# Altium PCB turnRacingMain.PcbDoc (part 2 of 2)
Units mil, origin at the board's own origin, x right, y up, seen from the top; angles counter-clockwise.
Board outline 9596.84 x 4626.79 mil, 2 copper layers (Component Side, Bottom Layer), stack 12.8 mil thick; 110 components, 131 nets, 424 pads, 166 vias.
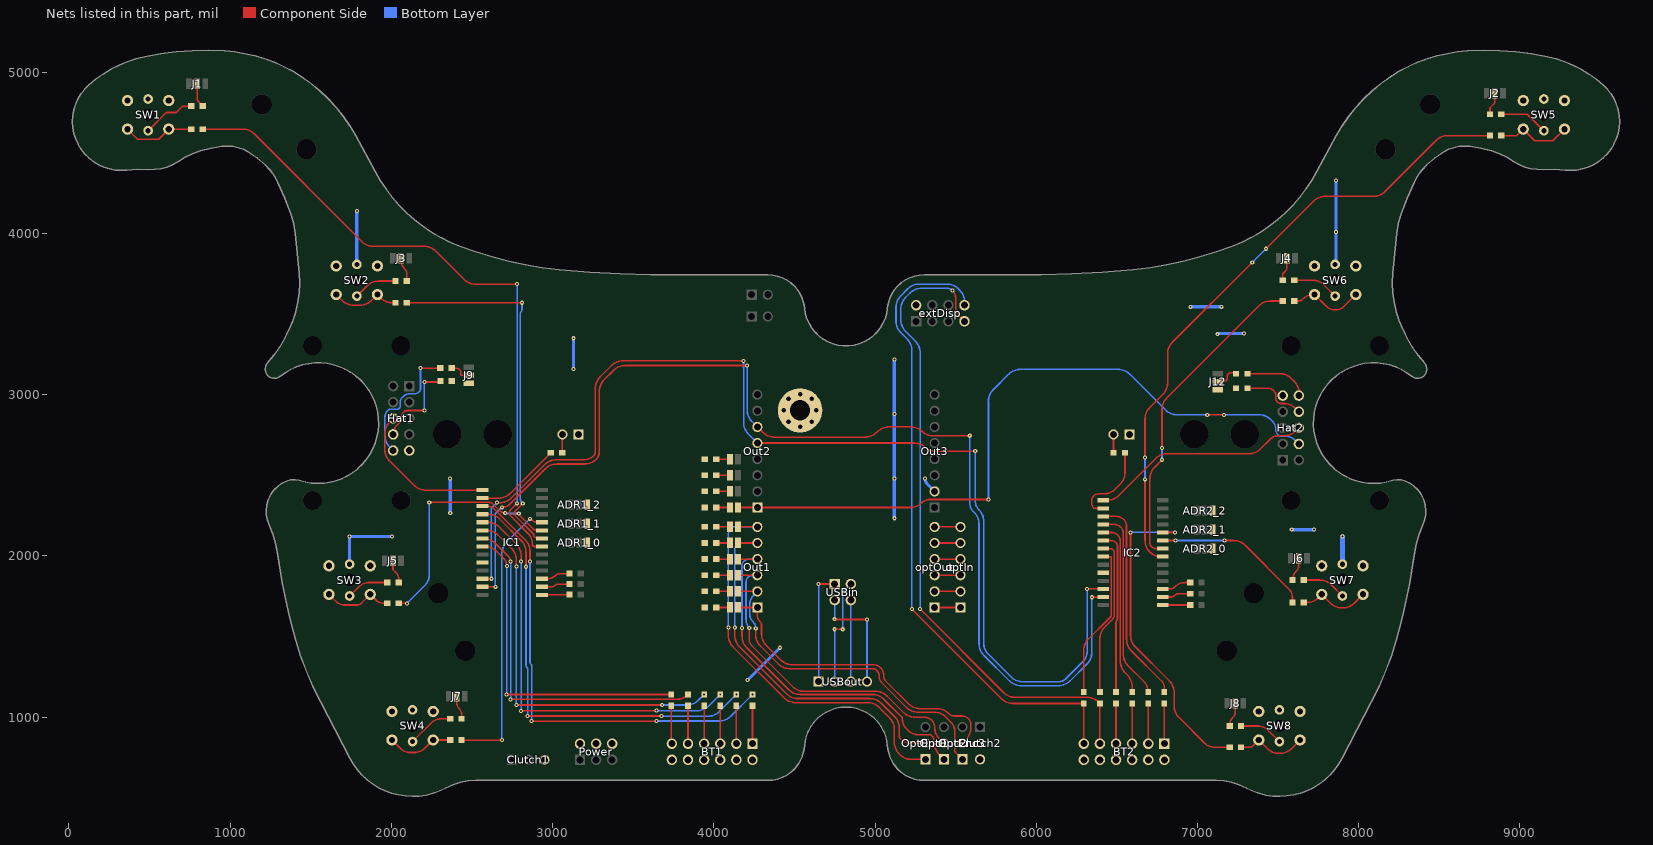
[diagram p2: the nets of this part, all layers, seen from the top]

## Via types
v1: diameter 25.2, hole 11.81, Component Side to Bottom Layer, 158 vias
v2: diameter 50, hole 28, Component Side to Bottom Layer, 8 vias

## Nets (pads, with @x,y where several pads share a name; then routed paths per layer and width w, separated by ;. In a path a pad name is that pad's centre, name@x,y a point inside that pad or via, vN(x,y) a via of type N, cw(c..) or ccw(c..) an arc to the next point about the centre after c; other vN are vias at no path point) (continued)
EncB2: Hat2.4 J14.1 Out2.1 | length 4400.7
  Component Side w10: J14.1@4150,2300 Out2.1@4270,2300 5219.37,2300 ccw(c5219.37,2400) 5290.08,2329.29 cw(c5340.08,2279.29) 5340.08,2350 v1(5703.58,2350) ; v1(7060.94,2875) 7159.05,2875 cw(c7159.05,2866.59) 7165,2872.54 v1(7165,2875)
  Bottom Layer w10: v1(5703.58,2350) 5703.58,2960.29 cw(c5803.58,2960.29) 5732.87,3031 5829.44,3127.58 cw(c5900.15,3056.87) 5900.15,3156.87 6508.56,3156.87 cw(c6508.56,3056.87) 6579.27,3127.58 6802.56,2904.29 ccw(c6873.27,2975) 6873.27,2875 v1(7060.94,2875) ; v1(7165,2875) 7383.58,2875 cw(c7383.58,2775) 7454.29,2845.71 7465.71,2834.29 cw(c7415.19,2783.77) 7486.64,2783.77 7486.64,2782.64 ccw(c7533.16,2782.64) 7500.26,2749.74 ccw(c7515.3,2764.77) 7515.3,2743.51 7538.39,2743.51 cw(c7538.39,2643.51) 7609.1,2714.22 Hat2.4@7629.12,2694.21
EncCom1: Hat1.10 R41.1 | length 805.1
  Component Side w10: v1(2181.51,3164.23) cw(c2183.38,3162.36) 2183.38,3165 R41.1@2304.13,3165
  Bottom Layer w10: Hat1.10@2010.89,2653.29 1989.29,2674.89 cw(c2060,2745.6) 1960,2745.6 1960,2856.72 cw(c2028.28,2856.72) 1980,2905 cw(c1990.97,2894.03) 1990.97,2909.54 2035.52,2909.54 ccw(c2035.52,2928.17) 2048.69,2915 ccw(c2033.46,2930.23) 2055,2930.23 2055,2954.22 cw(c2091.46,2954.22) 2065.68,2980 2076.39,2990.71 cw(c2110.89,2956.21) 2110.89,3005 2137.45,3005 ccw(c2137.45,3058.11) 2175,3020.56 ccw(c2160.59,3034.97) 2180.97,3034.97 2180.97,3164.23 v1(2181.51,3164.23)
EncCom2: Hat2.10 R43.1 | length 400.9
  Component Side w10: R43.1@7310.43,3130 7510.99,3130 cw(c7510.99,3030) 7581.7,3100.71 7599.83,3082.58 cw(c7529.12,3011.87) 7629.12,3011.87 Hat2.10@7629.12,2994.21
GND: ADR1_0.1 ADR1_1.1 ADR1_2.1 ADR2_0.1 ADR2_1.1 ADR2_2.1 BT1.2 BT1.4 BT1.6 BT1.8 BT1.10 BT1.12 BT2.2 BT2.4 BT2.6 BT2.8 BT2.10 BT2.12 Clutch1.3 Clutch2.3 extDisp.2 Hat1.9 Hat2.9 IC1.10 IC2.10 J9.1 J12.1 M1.1 Out3.2 Power.2 Power.4 Power.6 R9.2 R10.2 R11.2 R12.2 R13.2 R14.2 R15.2 R16.2 R17.2 R18.2 R42.1 R44.1 Shift1.1 Shift2.1 SW1.1 SW1.2 SW1.6 SW2.1 SW2.2 SW2.6 SW3.1 SW3.2 SW3.6 SW4.1 SW4.2 SW4.6 SW5.1 SW5.2 SW5.6 SW6.1 SW6.2 SW6.6 SW7.1 SW7.2 SW7.6 SW8.1 SW8.2 SW8.6 | length 3769.1
  Component Side w10: SW1.6@481.41,4824.23 SW1.6@491.26,4834.07 SW1.6@501.1,4824.23 ; v1(6956.42,3545) ccw(c6956.42,3550.06) v1@6960,3546.48
  Component Side w20: v1(5119.8,2480) v1@5120,2480
  Bottom Layer w10: v1(7123.13,3375) cw(c7135.2,3362.93) 7135.2,3380
  Bottom Layer w20: SW3.6@1740.89,1948.18 v1(1740.89,2120) v1(2005,2120) ; SW2.6@1785.59,3807.96 v1(1785.59,4140) ; v1(2364.42,2479.7) cw(c2363,2478.29) 2365,2478.29 v1(2365,2265) ; v1(3129.44,3160) ccw(c3128.1,3161.34) 3130,3161.34 v1(3130,3350) ; v1(4210,1230) 4210.42,1230 v1(4410.42,1430) ; v1(5119.92,3216.87) 5119.66,3216.61 v1(5119.66,2880) 5119.8,2879.86 v1(5119.8,2480) 5119.8,2233.23 v1(5120,2233.43) ; v1(5310,2480) ccw(c5358.28,2480) 5324.14,2445.86 Out3.2@5370,2400 ; v1(6956.42,3545) v1(7148.42,3545) ; 7135.2,3380 v1(7290,3380) ; v1(7585,2162.52) 7720.71,2162.52 cw(c7720.71,2159.3) 7722.99,2161.58 v1(7722.99,2162.88) ; SW6.6@7854.41,3807.96 ccw(c7840.91,3821.46) 7860,3821.46 v1(7860,4010) v1(7860,4328.88)
  Bottom Layer w30: SW7.6@7899.11,1948.18 v1(7899.11,2120)
  other v2: 4535,2801.14 4463.31,2830.84 4606.69,2830.84 4433.62,2902.52 4636.38,2902.52 4463.31,2974.2 4606.69,2974.2 4535,3003.9
NetHat1_8: Hat1.8 R42.2 | length 570.6
  Component Side w10: Hat1.8@2010.89,2753.29 cw(c2090.02,2753.29) 2034.07,2809.25 2046.97,2822.16 ccw(c2015.53,2853.6) 2060,2853.6 2060,2854.88 cw(c2111.21,2854.88) 2074.99,2891.09 2077.86,2893.96 cw(c2096.32,2875.5) 2096.32,2901.6 2204.01,2901.6 v1(2204.56,2901.05) ; v1(2205,3078.21) 2288.17,3078.21 ccw(c2288.17,3101.4) R42.2@2304.57,3085
  Bottom Layer w10: v1(2204.56,2901.05) cw(c2203.51,2900) 2205,2900 v1(2205,3078.21)
NetHat2_8: Hat2.8 R44.2 | length 396.8
  Component Side w10: R44.2@7310.43,3040 7437.56,3040 cw(c7437.56,2994.12) 7470,3026.56 7480.54,3016.02 cw(c7469.78,3005.26) 7485,3005.26 7485,2978.22 ccw(c7517.84,2978.22) 7494.62,2955 7494.71,2954.91 ccw(c7518.64,2978.85) 7518.64,2945 7536.9,2945 cw(c7536.9,2845) 7607.61,2915.71 Hat2.8@7629.12,2894.21
NetIC1_2: IC1.2 R19.1 | length 536
  Component Side w10: IC1.2@2565.94,2358.19 2666.33,2358.19 ccw(c2666.33,2458.19) 2737.04,2387.48 R19.1@2989.57,2640
NetIC1_3: IC1.3 R21.1 | length 2918.1
  Component Side w10: IC1.3@2565.94,2308.19 2601.85,2308.19 cw(c2601.85,2261.3) 2635,2294.45 2830.71,2098.74 cw(c2760,2028.03) 2860,2028.03 v1(2860,1965) ; v1(2870,975) 3643.47,975 ccw(c3643.47,977.16) v1(3645,975.63)
  Bottom Layer w10: v1(2860,1965) 2860,1346.14 cw(c2858.39,1346.14) 2859.53,1345 2859.53,1341.9 ccw(c2878.21,1341.9) 2865,1328.68 cw(c2852.93,1316.61) 2870,1316.61 v1(2870,975) ; v1(3645,975.63) 4033.78,975.63 ccw(c4033.78,1075.63) 4104.49,1004.92 v1(4240,1140.43)
NetIC1_4: IC1.4 R23.1 | length 2749
  Component Side w10: IC1.4@2565.94,2258.19 2600.39,2258.19 cw(c2600.39,2158.19) 2671.1,2228.9 2805.71,2094.29 cw(c2735,2023.58) 2835,2023.58 v1(2835,1932.52) ; v1(2845,1006.57) v1(3676.21,1006.57)
  Bottom Layer w10: v1(2835,1932.52) 2835,1320.85 ccw(c2852.07,1320.85) 2840,1308.78 cw(c2827.93,1296.71) 2845,1296.71 v1(2845,1006.57) ; v1(3676.21,1006.57) cw(c3676.21,1001.21) 3680,1005 3963.58,1005 ccw(c3963.58,1105) 4034.29,1034.29 4140,1140 v1(4140,1140.43)
NetIC1_5: IC1.5 R26.1 | length 2579.7
  Component Side w10: IC1.5@2565.94,2208.19 2599.14,2208.19 cw(c2599.14,2108.19) 2669.85,2178.9 2775.71,2073.04 cw(c2705,2002.33) 2805,2002.33 v1(2805,1965) ; v1(2805,1038.91) 3642.36,1038.91 ccw(c3642.36,1042.64) v1(3645,1040)
  Bottom Layer w10: v1@2805,1035 v1(2805,1038.91) v1(2805,1965) ; v1(3645,1040) 3898.58,1040 ccw(c3898.58,1140) 3969.29,1069.29 v1(4040,1140)
NetIC1_6: IC1.6 R29.1 | length 2387.9
  Component Side w10: IC1.6@2565.94,2158.19 2591.27,2158.19 cw(c2591.27,2058.19) 2661.98,2128.9 2745.71,2045.17 cw(c2675,1974.45) 2775,1974.45 v1(2775,1935) ; v1(2775,1075) v1(3680,1075)
  Bottom Layer w10: v1(2775,1075) v1(2775,1935) ; v1(3680,1075) 3833.58,1075 ccw(c3833.58,1175) 3904.29,1104.29 v1(3940,1140)
NetIC1_7: IC1.7 R32.1 | length 2200.9
  Component Side w10: IC1.7@2565.94,2108.19 2573,2108.19 cw(c2573,2008.19) 2643.71,2078.9 2727.55,1995.05 cw(c2697.5,1965) v1(2740,1965) ; v1(2740,1110) 3768.14,1110 ccw(c3768.14,1210) 3838.85,1139.29 R32.1@3840,1140.43
  Bottom Layer w10: v1(2740,1110) v1(2740,1965)
NetIC1_8: IC1.8 R35.1 | length 2028.6
  Component Side w10: IC1.8@2565.94,2058.19 2581.37,2058.19 cw(c2581.37,1958.19) 2652.08,2028.9 2697.66,1983.32 cw(c2652.68,1938.34) v1(2716.3,1938.34) ; v1(2715,1140) 3735.41,1140 ccw(c3735.41,1141.48) R35.1@3736.46,1140.43
  Bottom Layer w10: v1(2715,1140) ccw(c2711.87,1143.13) 2716.3,1143.13 v1(2716.3,1938.34)
NetIC1_15: IC1.15 R49.2 | length 171
  Component Side w10: IC1.15@2934.06,1758.19 3100.19,1758.19 ccw(c3100.19,1764.37) R49.2@3104.57,1760
NetIC1_16: IC1.16 R47.2 | length 175
  Component Side w10: IC1.16@2934.06,1808.19 2994.98,1808.19 ccw(c2994.98,1831.45) 3011.42,1815 cw(c3035.57,1790.86) 3035.57,1825 R47.2@3104.57,1825
NetIC1_17: IC1.17 R45.2 | length 179
  Component Side w10: IC1.17@2934.06,1858.19 2967.34,1858.19 ccw(c2967.34,1932.66) 3020,1880 cw(c3044.14,1855.86) 3044.14,1890 R45.2@3104.57,1890
NetIC1_21: IC1.21 R39.2 | length 4087.1
  Component Side w10: R39.2@830.43,4647.07 1077.92,4647.07 cw(c1077.92,4547.07) 1148.63,4617.78 1817.12,3949.29 ccw(c1887.83,4020) 1887.83,3920 2204.01,3920 cw(c2204.01,3820) 2274.72,3890.71 2451.14,3714.29 ccw(c2521.86,3785) 2521.86,3685 2777.84,3685 v1(2780,3687.16) ; v1(2780,2326.13) 2741.3,2287.43 ccw(c2764.78,2263.96) 2731.58,2263.96 ccw(c2751.32,2263.96) 2737.35,2250.01 2846.24,2141.12 cw(c2776.82,2071.69) 2875,2071.69 ccw(c2889.03,2071.69) 2879.11,2061.77 ccw(c2887.75,2070.4) 2887.75,2058.19 IC1.21@2934.06,2058.19
  Bottom Layer w10: v1(2780,2326.13) v1(2780,3687.16)
NetIC1_22: IC1.22 R36.2 | length 2297.1
  Component Side w10: R36.2@2096.32,3570 v1(2810,3570) ; v1(2814.77,2325) 2764.44,2274.67 ccw(c2775.16,2263.96) 2760,2263.96 ccw(c2774.06,2263.96) 2764.12,2254.02 2880.3,2137.84 cw(c2871.36,2128.9) 2884,2128.9 2884,2126.23 ccw(c2892.8,2126.23) 2886.58,2120 ccw(c2915.09,2148.52) 2915.09,2108.19 IC1.22@2934.06,2108.19
  Bottom Layer w10: v1(2810,3570) 2810,3527.07 cw(c2792.93,3527.07) 2805,3515 ccw(c2817.07,3502.93) 2800,3502.93 2800,2351.93 ccw(c2816.87,2351.93) 2804.94,2340 cw(c2791.9,2326.96) 2810.34,2326.96 2810.34,2325 v1(2814.77,2325)
NetIC1_23: IC1.23 R33.2 | length 1505.4
  Component Side w10: R33.2@2046.32,1706.17 2093.23,1706.17 cw(c2093.23,1702.18) v1(2096.05,1705) ; v1(2235,2331.65) 2610,2331.65 cw(c2610,2306.99) 2627.44,2324.43 2670.91,2280.95 ccw(c2709.43,2319.47) 2709.43,2265 2709.21,2265.22 v1(2706.1,2265.22) ; v1(2790,2263.13) ccw(c2805.81,2263.13) 2794.63,2251.95 2876.58,2170 ccw(c2905.09,2198.52) 2905.09,2158.19 IC1.23@2934.06,2158.19
  Bottom Layer w10: v1(2096.05,1705) 2205.71,1814.66 ccw(c2135,1885.37) 2235,1885.37 v1(2235,2331.65) ; v1(2706.1,2265.22) 2709.21,2265.22 2709.43,2265 ccw(c2713.95,2269.52) 2713.95,2263.13 v1(2790,2263.13)
NetIC1_24: IC1.24 R30.2 | length 1770.6
  Component Side w10: R30.2@2435.43,857.93 ccw(c2437.14,859.63) 2437.14,857.23 v1(2685,857.23) ; v1(2860,2230) ccw(c2912.66,2282.66) 2912.66,2208.19 IC1.24@2934.06,2208.19
  Bottom Layer w10: v1(2685,857.23) 2685,2013.58 cw(c2785,2013.58) 2714.29,2084.29 v1(2860,2230)
NetIC2_2: IC2.2 R38.1 | length 532.6
  Component Side w10: IC2.2@6415.94,2295 6357.69,2295 cw(c6388.32,2325.63) 6345,2325.63 6345,2345.86 cw(c6379.14,2345.86) 6355,2370 cw(c6391.21,2333.79) 6391.21,2385 6419.23,2385 ccw(c6419.23,2485) 6489.94,2414.29 6521.14,2445.5 ccw(c6450.43,2516.21) 6550.43,2516.21 R38.1@6550.43,2640
NetIC2_3: IC2.3 R25.1 | length 1297.7
  Component Side w10: IC2.3@6415.94,2245 6494.41,2245 cw(c6494.41,2173.45) 6545,2224.04 cw(c6508.79,2187.83) 6560,2187.83 6560,1482.73 ccw(c6660,1482.73) 6589.29,1412.02 6780,1221.31 cw(c6747.32,1188.62) 6793.54,1188.62 R25.1@6793.54,1155.43
NetIC2_4: IC2.4 R28.1 | length 1195.5
  Component Side w10: IC2.4@6415.94,2195 6482.04,2195 cw(c6482.04,2134.24) 6525,2177.2 cw(c6488.79,2140.99) 6540,2140.99 6540,1389.91 ccw(c6640,1389.91) 6569.29,1319.2 6668.09,1220.39 cw(c6603.14,1155.43) R28.1@6695,1155.43
NetIC2_5: IC2.5 R31.1 | length 1093.3
  Component Side w10: IC2.5@6415.94,2145 6468.04,2145 cw(c6468.04,2093.79) 6504.25,2130 cw(c6462.05,2087.8) 6521.73,2087.8 6521.73,1346.18 ccw(c6621.73,1346.18) 6551.02,1275.47 6565.71,1260.78 cw(c6495,1190.07) 6595,1190.07 R31.1@6595,1155.43
NetIC2_6: IC2.6 R34.1 | length 1013.8
  Component Side w10: IC2.6@6415.94,2095 6463.16,2095 cw(c6463.16,2049.97) 6495,2081.81 cw(c6473.18,2059.99) 6504.04,2059.99 6504.04,1609.75 cw(c6490.25,1609.75) 6500,1600 ccw(c6512.07,1587.93) 6495,1587.93 R34.1@6495,1155.43
NetIC2_7: IC2.7 R37.1 | length 979.9
  Component Side w10: R37.1@6395,1155.43 6395,1487.48 cw(c6495,1487.48) 6424.29,1558.19 6475.65,1609.55 ccw(c6453.07,1632.13) 6485,1632.13 6485,2020.45 ccw(c6464.42,2020.45) 6478.97,2035 6468.97,2045 IC2.7@6415.94,2045
NetIC2_8: IC2.8 R40.1 | length 971.5
  Component Side w10: R40.1@6295,1155.43 6295,1415.31 cw(c6395,1415.31) 6324.29,1486.02 ; 6311.8,1471.8 6459.96,1619.96 ccw(c6447.79,1632.13) 6465,1632.13 6465,1988.63 ccw(c6455.99,1988.63) 6462.36,1995 IC2.8@6415.94,1995
NetIC2_15: IC2.15 R50.2 | length 170.5
  Component Side w10: IC2.15@6784.06,1695 R50.2@6954.57,1695
NetIC2_16: IC2.16 R48.2 | length 175.9
  Component Side w10: IC2.16@6784.06,1745 6836.28,1745 ccw(c6836.28,1778.54) 6860,1754.82 cw(c6884.57,1730.25) 6884.57,1765 R48.2@6954.57,1765
NetIC2_17: IC2.17 R46.2 | length 181.2
  Component Side w10: IC2.17@6784.06,1795 6828.16,1795 ccw(c6828.16,1840.03) 6860,1808.19 cw(c6924.73,1743.46) 6924.73,1835 R46.2@6954.57,1835
NetIC2_21: IC2.21 R27.2 | length 3941
  Component Side w10: v1(6675,2475) 6675,2095.54 ccw(c6775,2095.54) 6704.29,2024.83 6704.83,2024.29 ccw(c6775.54,2095) 6775.54,1995 IC2.21@6784.06,1995 ; v1(6675,2610) 6675,2849.58 cw(c6775,2849.58) 6704.29,2920.29 6785.71,3001.71 ccw(c6715,3072.42) 6815,3072.42 6815,3253.58 cw(c6915,3253.58) 6844.29,3324.29 v1(7340,3820) ; v1(7425,3905) 7720.71,4200.71 cw(c7791.42,4130) 7791.42,4230 8091.98,4230 ccw(c8091.98,4330) 8162.69,4259.29 8481.18,4577.78 cw(c8551.89,4507.07) 8551.89,4607.07 R27.2@8814.57,4607.07
  Bottom Layer w10: v1(6675,2475) v1(6675,2610) ; v1(7340,3820) v1(7425,3905)
NetIC2_22: IC2.22 R24.2 | length 1997.6
  Component Side w10: v1(6780,2596.12) 6734.29,2550.41 ccw(c6805,2479.7) 6705,2479.7 6705,2080.49 ccw(c6739.14,2080.49) 6715,2056.34 ccw(c6742.39,2083.73) 6742.39,2045 IC2.22@6784.06,2045 ; v1(6780,2670) 6780,2908.79 cw(c6880,2908.79) 6809.29,2979.5 7381.46,3551.66 cw(c7452.17,3480.95) 7452.17,3580.95 R24.2@7529.57,3580.95
  Bottom Layer w10: v1(6780,2596.12) v1(6780,2670)
NetIC2_23: IC2.23 R22.2 | length 992.4
  Component Side w10: IC2.23@6784.06,2095 v1(6865,2095) ; v1(7169.03,2095) 7225.14,2095 cw(c7225.14,1995) 7295.85,2065.71 7566.56,1795 cw(c7511.02,1739.46) 7589.57,1739.46 R22.2@7589.57,1711.17
  Bottom Layer w10: v1(6865,2095) v1(7169.03,2095)
NetIC2_24: IC2.24 R20.2 | length 1997.7
  Component Side w10: v1(6585,2145.95) 6585,1506.42 ccw(c6685,1506.42) 6614.29,1435.71 6826.62,1223.38 cw(c6755.91,1152.67) 6855.91,1152.67 6855.91,1069.04 ccw(c6955.91,1069.04) 6885.2,998.33 7045,838.53 ccw(c7106.8,900.33) 7106.8,812.93 R20.2@7199.57,812.93 ; IC2.24@6784.06,2145 v1(6860,2145)
  Bottom Layer w10: v1(6585,2145.95) 6852.72,2145.95 cw(c6852.72,2142.72) 6855,2145 v1(6860,2145)
NetJ1_2: J1.2 R1.1 | length 154.7
  Component Side w10: J1.2@795,4930 795,4825.43 R1.1@830.43,4790
NetJ2_2: J2.2 R2.1 | length 142.6
  Component Side w10: R2.1@8814.57,4740 8814.57,4778.68 8845,4809.11 J2.2@8845,4870
NetJ3_2: J3.2 R3.1 | length 149.7
  Component Side w10: J3.2@2060,3845 2060,3837.48 ccw(c2147.13,3837.48) 2085.52,3775.87 cw(c2059.44,3749.8) 2096.32,3749.8 R3.1@2096.32,3705
NetJ4_2: J4.2 R4.1 | length 143.8
  Component Side w10: R4.1@7529.57,3710 7529.57,3747.3 cw(c7536.88,3747.3) 7531.71,3752.47 7545,3765.76 ccw(c7520.86,3789.91) 7555,3789.91 J4.2@7555,3845
NetJ5_2: J5.2 R5.1 | length 146.9
  Component Side w10: J5.2@2010,1970 2010,1915.94 ccw(c2011.18,1915.94) 2010.35,1915.11 2025.45,1900 cw(c1975.07,1849.62) 2046.32,1849.62 R5.1@2046.32,1835
NetJ6_2: J6.2 R6.1 | length 145.6
  Component Side w10: R6.1@7589.57,1850 cw(c7664.99,1850) 7611.66,1903.33 ccw(c7569.5,1945.48) 7629.12,1945.48 J6.2@7629.12,1985
NetJ7_2: J7.2 R7.1 | length 148.1
  Component Side w10: J7.2@2405,1130 2405,1090.82 ccw(c2455.66,1090.82) 2419.84,1055 cw(c2382.19,1017.35) 2435.43,1017.35 R7.1@2435.43,990
NetJ8_2: J8.2 R8.1 | length 149.5
  Component Side w10: R8.1@7199.57,945 cw(c7283.02,945) 7224.01,1004.01 ccw(c7197.47,1030.55) 7235,1030.55 J8.2@7235,1085
NetJ9_2: J9.2 R41.2 | length 134.9
  Component Side w10: R41.2@2375,3165 2393.44,3165 cw(c2393.44,3118.34) 2426.43,3151.33 cw(c2417.81,3142.72) 2430,3142.72 2430,3125.43 ccw(c2434.66,3125.43) 2431.37,3122.13 2432.1,3121.4 ccw(c2435.43,3124.73) 2435.43,3120.02 J9.2@2453.42,3120.02 ; J9.2@2453.44,3120 J9.2@2480,3120
NetJ10_2: J10.2 R9.1 | length 84.6
  Component Side w10: R9.1@4015.43,2600 J10.2@4100,2600
NetJ11_2: J11.2 R10.1 | length 84.6
  Component Side w10: R10.1@4015.43,2500 J11.2@4100,2500
NetJ12_2: J12.2 R43.2 | length 152.1
  Component Side w10: J12.2@7125,3080 7156.32,3080 ccw(c7156.32,3113.49) 7180,3089.81 ccw(c7167.93,3101.88) 7185,3101.88 7185,3114.1 cw(c7206,3114.1) 7191.15,3128.96 7191.33,3129.13 cw(c7210,3110.46) 7210,3136.87 7222.99,3136.87 cw(c7222.99,3113.42) R43.2@7239.57,3130
NetJ13_2: J13.2 R11.1 | length 84.6
  Component Side w10: R11.1@4015.43,2400 J13.2@4100,2400
NetJ14_2: J14.2 R12.1 | length 84.6
  Component Side w10: R12.1@4015.43,2300 J14.2@4100,2300
NetJ15_2: J15.2 R13.1 | length 84.6
  Component Side w10: R13.1@4015.43,2180 J15.2@4100,2180
NetJ16_2: J16.2 R14.1 | length 84.6
  Component Side w10: R14.1@4015.43,2080 J16.2@4100,2080
NetJ17_2: J17.2 R15.1 | length 84.6
  Component Side w10: R15.1@4015.43,1980 J17.2@4100,1980
NetJ18_2: J18.2 R16.1 | length 84.6
  Component Side w10: R16.1@4015.43,1880 J18.2@4100,1880
NetJ19_2: J19.2 R17.1 | length 84.6
  Component Side w10: R17.1@4015.43,1780 J19.2@4100,1780
NetJ20_2: J20.2 R18.1 | length 84.6
  Component Side w10: R18.1@4015.43,1680 J20.2@4100,1680
NetR1_2: R1.2 SW1.5 | length 331.6
  Component Side w10: SW1.5@491.26,4637.22 604.03,4750 665,4750 705,4790 R1.2@759.57,4790
NetR2_2: R2.2 SW5.5 | length 305.9
  Component Side w10: R2.2@8885.43,4740 9045.97,4740 SW5.5@9148.75,4637.22
NetR3_2: R3.2 SW2.5 | length 274.4
  Component Side w10: SW2.5@1785.59,3611.11 1850.19,3675.71 cw(c1920.9,3605) 1920.9,3705 R3.2@2025.45,3705
NetR4_2: R4.2 SW6.5 | length 290.6
  Component Side w10: R4.2@7600.43,3710 7714.1,3710 cw(c7714.1,3610) 7784.81,3680.71 SW6.5@7854.41,3611.11
NetR5_2: R5.2 SW3.5 | length 265.1
  Component Side w10: SW3.5@1740.89,1751.33 1795.43,1805.87 cw(c1866.14,1735.16) 1866.14,1835.16 1975.29,1835.16 R5.2@1975.45,1835
NetR6_2: R6.2 SW7.5 | length 275.2
  Component Side w10: R6.2@7660.43,1850 7759.02,1850 cw(c7759.02,1750) 7829.73,1820.71 SW7.5@7899.11,1751.33
NetR7_2: R7.2 SW4.5 | length 287.7
  Component Side w10: SW4.5@2131.36,848.09 2243.98,960.71 cw(c2314.69,890) 2314.69,990 R7.2@2364.57,990
NetR8_2: R8.2 SW8.5 | length 274.1
  Component Side w10: R8.2@7270.43,945 7370.32,945 cw(c7370.32,845) 7441.03,915.71 SW8.5@7508.65,848.09
NetUSBin_1: USBin.1 USBout.1 | length 705.4
  Component Side w10: v1(4650,1825.43) USBin.1@4749.93,1825.43
  Bottom Layer w10: USBout.1@4650,1220 v1(4650,1825.43)
NetUSBin_2: USBin.2 USBout.2 | length 676.3
  Component Side w10: v1(4749.93,1545) v1(4800,1545)
  Bottom Layer w10: v1(4749.93,1545) 4750,1545 USBout.2@4750,1220 ; v1(4800,1545) 4800,1775.5 USBin.2@4849.93,1825.43
NetUSBin_3: USBin.3 USBout.4 | length 705.5
  Component Side w10: v1(4750,1607.09) 4750,1605 v1(4950,1605)
  Bottom Layer w10: USBin.3@4749.93,1725.43 4750,1725.36 v1(4750,1607.09) ; USBout.4@4950,1220 v1(4950,1605)
NetUSBin_4: USBin.4 USBout.3 | length 505.5
  Bottom Layer w10: USBin.4@4849.93,1725.43 4850,1725.36 USBout.3@4850,1220
OptEncA1: J15.1 OptEnc1.1 Out1.6 | length 2590.4
  Component Side w10: v1(4090,1555.2) 4090,1505.94 ccw(c4190,1505.94) 4119.29,1435.23 4435.23,1119.29 ccw(c4505.94,1190) 4505.94,1090 4953.58,1090 cw(c4953.58,990) 5024.29,1060.71 5090.71,994.29 cw(c5020,923.58) 5120,923.58 5120,842.36 ccw(c5220,842.36) 5149.29,771.65 5153.44,767.5 ccw(c5224.15,838.21) 5224.15,738.21 OptEnc1.1@5312.12,738.21 ; J15.1@4150,2180 Out1.6@4270,2180
  Bottom Layer w10: v1(4090,1555.2) 4090,2126.72 cw(c4158.28,2126.72) 4110,2175 cw(c4122.07,2162.93) 4122.07,2180 Out1.6@4270,2180
OptEncA2: J17.1 OptEnc2.1 Out1.4 | length 2305.6
  Component Side w10: J17.1@4150,1980 Out1.4@4270,1980 ; v1(4175,1551.87) 4175,1501.42 ccw(c4275,1501.42) 4204.29,1430.71 4465.28,1169.72 ccw(c4535.99,1240.43) 4535.99,1140.43 4984.24,1140.43 cw(c4984.24,1040.43) 5054.96,1111.14 5162.15,1003.95 cw(c5143.2,985) 5170,985 ccw(c5248.31,985) 5192.94,929.63 5203.27,919.29 ccw(c5273.98,990) 5273.98,890 5339.52,890 cw(c5339.52,872.93) 5351.59,885 cw(c5307.16,840.57) 5370,840.57 5370,836.75 ccw(c5470,836.75) 5399.29,766.04 OptEnc2.1@5427.12,738.21
  Bottom Layer w10: v1(4175,1551.87) 4175,1940.86 cw(c4209.14,1940.86) 4185,1965 cw(c4221.21,1928.79) 4221.21,1980 Out1.4@4270,1980
OptEncA3: J19.1 OptEnc3.1 Out1.2 | length 2133
  Component Side w10: J19.1@4150,1780 Out1.2@4270,1780 ; v1(4260,1550) 4260,1511.42 ccw(c4360,1511.42) 4289.29,1440.71 4400.71,1329.29 ccw(c4471.42,1400) 4471.42,1300 4985.86,1300 cw(c4985.86,1265.86) 5010,1290 cw(c4970.13,1250.13) 5026.51,1250.13 5026.51,1247.48 ccw(c5072.37,1247.48) 5039.95,1215.05 5195.71,1059.29 ccw(c5266.42,1130) 5266.42,1030 5368.58,1030 cw(c5368.58,930) 5439.29,1000.71 5470,970 cw(c5409.64,909.64) 5495,909.64 5495,792.07 ccw(c5511.27,792.07) 5499.77,780.56 OptEnc3.1@5542.12,738.21
  Bottom Layer w10: v1(4260,1550) 4260,1551.3 ccw(c4205.27,1551.3) 4243.97,1590 cw(c4295.46,1641.49) 4222.64,1641.49 4222.64,1691.22 cw(c4322.64,1691.22) 4251.93,1761.93 Out1.2@4270,1780
OptEncB1: J16.1 OptEnc1.2 Out1.5 | length 2339.4
  Component Side w10: v1(4130.22,1555) 4130.22,1506.21 ccw(c4230.22,1506.21) 4159.51,1435.5 4450.71,1144.29 ccw(c4521.42,1215) 4521.42,1115 4967.7,1115 cw(c4967.7,1015) 5038.41,1085.71 5125,999.12 cw(c5064.64,938.76) 5150,938.76 5150,889.19 ccw(c5188.83,889.19) 5161.37,861.73 ccw(c5218.16,918.52) 5218.16,838.21 OptEnc1.2@5312.12,838.21 ; J16.1@4150,2080 Out1.5@4270,2080
  Bottom Layer w10: v1(4130.22,1555) 4130.22,2039.31 cw(c4180.69,2039.31) 4145,2075 cw(c4157.07,2062.93) 4157.07,2080 Out1.5@4270,2080
OptEncB2: J18.1 OptEnc2.2 Out1.3 | length 2079.5
  Component Side w10: J18.1@4150,1880 Out1.3@4270,1880 ; v1(4220,1551.87) 4220,1477.11 ccw(c4266.11,1477.11) 4233.5,1444.51 4488.73,1189.29 ccw(c4559.44,1260) 4559.44,1160 5003.58,1160 cw(c5003.58,1060) 5074.29,1130.71 5176.22,1028.78 ccw(c5246.93,1099.49) 5246.93,999.49 5304.54,999.49 cw(c5304.54,932.94) 5351.59,980 cw(c5307.16,935.57) 5370,935.57 ccw(c5467.15,935.57) 5398.45,866.87 OptEnc2.2@5427.12,838.21
  Bottom Layer w10: v1(4220,1551.87) 4222.06,1551.87 cw(c4275.31,1605.12) 4200,1605.12 4200,1840.32 cw(c4234.9,1840.32) 4210.22,1865 cw(c4246.44,1828.79) 4246.44,1880 Out1.3@4270,1880
OptEncB3: J20.1 OptEnc3.2 Out1.1 | length 1990.9
  Component Side w10: J20.1@4150,1680 Out1.1@4270,1680 4270,1631.21 ccw(c4321.21,1631.21) 4285,1595 cw(c4258.37,1568.37) 4296.03,1568.37 4296.03,1515.39 ccw(c4396.03,1515.39) 4325.32,1444.68 4415.71,1354.29 ccw(c4486.42,1425) 4486.42,1325 4986.81,1325 cw(c4986.81,1256.95) 5034.93,1305.07 5035,1305 cw(c4991.6,1261.6) 5052.98,1261.6 5052.98,1250.47 ccw(c5085.43,1250.47) 5062.48,1227.52 5207.85,1082.15 ccw(c5278.56,1152.86) 5278.56,1052.86 5384.72,1052.86 cw(c5384.72,952.86) 5455.43,1023.57 5458.99,1020 ccw(c5491.42,1052.42) 5491.42,1006.57 5542.12,1006.57 cw(c5542.12,955.11) 5578.5,991.5 5580,990 cw(c5543.79,953.79) 5595,953.79 5595,940.59 cw(c5475.5,940.59) 5560,856.09 OptEnc3.2@5542.12,838.21
OptSw1: BT1.1 R21.2 | length 234.6
  Component Side w10: BT1.1@4240,835 R21.2@4240,1069.57
OptSw2: BT1.3 R23.2 | length 234.6
  Component Side w10: BT1.3@4140,835 R23.2@4140,1069.57
OptSw3: BT1.5 R26.2 | length 234.6
  Component Side w10: BT1.5@4040,835 R26.2@4040,1069.57
OptSw4: BT1.7 R29.2 | length 234.6
  Component Side w10: BT1.7@3940,835 R29.2@3940,1069.57
OptSw5: BT1.9 R32.2 | length 234.6
  Component Side w10: BT1.9@3840,835 R32.2@3840,1069.57
OptSw6: BT1.11 R35.2 | length 235.5
  Component Side w10: R35.2@3736.46,1069.57 3736.46,843.56 ccw(c3748.56,843.56) BT1.11@3740,835
OptSw7: BT2.1 R25.2 | length 250
  Component Side w10: R25.2@6793.54,1084.57 6793.54,838.53 ccw(c6798.53,838.53) BT2.1@6795,835
OptSw8: BT2.3 R28.2 | length 249.6
  Component Side w10: BT2.3@6695,835 R28.2@6695,1084.57
OptSw9: BT2.5 R31.2 | length 249.6
  Component Side w10: BT2.5@6595,835 R31.2@6595,1084.57
OptSw10: BT2.7 R34.2 | length 249.6
  Component Side w10: BT2.7@6495,835 R34.2@6495,1084.57
OptSw11: BT2.9 extDisp.7 R37.2 | length 4110.5
  Component Side w10: v1(5280.2,1669.8) 5798.23,1151.77 ccw(c5868.94,1222.48) 5868.94,1122.48 6315.66,1122.48 cw(c6315.66,1022.48) R37.2@6386.37,1093.19 ; v1(5480.38,3645) 5482.06,3643.32 cw(c5438.73,3600) 5500,3600 5500,3532.57 ccw(c5554.48,3532.57) 5515.96,3494.04 extDisp.7@5555,3455 ; R37.2@6386.38,1093.19 R37.2@6395,1084.57 BT2.9@6395,835
  Bottom Layer w10: v1(5280.2,1669.8) 5280.2,3260.25 ccw(c5180.2,3260.25) 5250.91,3330.96 5189.29,3392.58 cw(c5260,3463.29) 5160,3463.29 5160,3531.98 cw(c5260,3531.98) 5189.29,3602.69 5217.31,3630.71 cw(c5288.02,3560) 5288.02,3660 5444.17,3660 cw(c5444.17,3608.79) v1(5480.38,3645)
OptSw12: BT2.11 extDisp.8 R40.2 | length 4041.1
  Component Side w10: v1(5228.6,1670) 5784.74,1113.86 ccw(c5855.46,1184.57) 5855.46,1084.57 R40.2@6295,1084.57 BT2.11@6295,835
  Bottom Layer w10: v1(5228.6,1670) 5228.6,3274.23 ccw(c5128.6,3274.23) 5199.31,3344.94 5159.29,3384.96 cw(c5230,3455.67) 5130,3455.67 5130,3541.63 cw(c5230,3541.63) 5159.29,3612.34 5203.45,3656.5 cw(c5274.16,3585.79) 5274.16,3685.79 5446.21,3685.79 cw(c5446.21,3585.79) 5516.92,3656.5 5525.71,3647.71 cw(c5455,3577) 5555,3577 extDisp.8@5555,3555
PDI: optIn.3 optOut.3 | length 160
  Component Side w10: optOut.3@5370,1880 optIn.3@5530,1880
PDO: optIn.4 optOut.4 | length 160
  Component Side w10: optOut.4@5370,1980 optIn.4@5530,1980
Push1: Hat1.6 IC1.1 | length 936.7
  Component Side w10: Hat1.6@2010.89,2853.29 1989.29,2831.7 ccw(c2060,2760.98) 1960,2760.98 1960,2656.91 ccw(c2054.63,2656.91) 1987.72,2590 2140.24,2437.48 ccw(c2210.95,2508.19) 2210.95,2408.19 IC1.1@2565.94,2408.19
Push2: Hat2.6 IC2.1 | length 1379.4
  Component Side w10: IC2.1@6415.94,2345 6440.78,2345 ccw(c6440.78,2445) 6511.49,2374.29 6742.31,2605.1 cw(c6813.02,2534.39) 6813.02,2634.39 7325,2634.39 ccw(c7325,2724.19) 7388.5,2660.69 7451.89,2724.08 cw(c7502.38,2673.59) 7502.38,2745 7538.49,2745 ccw(c7538.49,2845) 7609.2,2774.29 Hat2.6@7629.12,2794.21
RXLED: optIn.6 optOut.6 | length 160
  Component Side w10: optOut.6@5370,2180 optIn.6@5530,2180
SCL: IC1.12 IC2.12 Out2.5 | length 7123.8
  Component Side w10: IC1.12@2565.94,1858.19 v1(2620,1858.19) ; v1(2655,2330) 2673.46,2330 ccw(c2673.46,2430) 2744.17,2359.29 2951.61,2566.73 cw(c3022.32,2496.02) 3022.32,2596.02 3192.49,2596.02 ccw(c3192.49,2684.43) 3255,2621.91 ccw(c3230.86,2646.05) 3265,2646.05 3265,3038.58 cw(c3365,3038.58) 3294.29,3109.29 3365.71,3180.71 cw(c3436.42,3110) 3436.42,3210 v1(4185,3210) ; Out2.5@4270,2700 5243.58,2700 cw(c5243.58,2600) 5314.29,2670.71 ccw(c5364.29,2720.71) 5364.29,2650 v1(5621.87,2650) ; v1(6315.71,1795) IC2.12@6415.94,1795
  Bottom Layer w10: v1(2620,1858.19) 2620,2295 v1(2655,2330) ; v1(4185,3210) 4184.38,3209.38 4184.38,3170.64 4185,3170.02 4185,2826.42 ccw(c4285,2826.42) 4214.29,2755.71 Out2.5@4270,2700 ; v1(5621.87,2650) 5621.87,2339.84 ccw(c5698.42,2339.84) 5644.29,2285.71 5645,2285 cw(c5574.29,2214.29) 5674.29,2214.29 5674.29,1460.02 ccw(c5774.29,1460.02) 5703.58,1389.31 5846.64,1246.24 ccw(c5910,1309.6) 5910,1220 6143.79,1220 ccw(c6143.79,1271.21) 6179.99,1234.99 6291.46,1346.46 ccw(c6232.93,1405) 6315.71,1405 v1(6315.71,1795)
SCLK: optIn.2 optOut.2 | length 160
  Component Side w10: optOut.2@5370,1780 optIn.2@5530,1780
SDA: IC1.13 IC2.13 Out2.6 | length 7138.3
  Component Side w10: IC1.13@2565.94,1808.19 v1(2645,1808.19) ; v1(2685,2301.32) ccw(c2685,2375.72) 2737.6,2323.11 2955.2,2540.71 cw(c3025.92,2470) 3025.92,2570 3202.08,2570 ccw(c3202.08,2666.05) 3270,2598.13 ccw(c3221.72,2646.42) 3290,2646.42 3290,3021.52 cw(c3390,3021.52) 3319.29,3092.23 3378.48,3151.42 cw(c3449.19,3080.71) 3449.19,3180.71 v1@4215,3180.71 ; Out2.6@4270,2800 4303.9,2766.1 ccw(c4374.61,2836.81) 4374.61,2736.81 4939.68,2736.81 ccw(c4939.68,2836.81) 5010.39,2766.1 5015,2770.71 cw(c5085.71,2700) 5085.71,2800 5223.58,2800 cw(c5223.58,2700) 5294.29,2770.71 5295.47,2769.53 ccw(c5354.7,2828.77) 5354.7,2745 v1(5587.74,2745) ; v1(6345,1743.19) 6411.57,1743.19 ccw(c6411.57,1749.37) IC2.13@6415.94,1745
  Bottom Layer w10: v1(2645,1808.19) 2645,2261.32 v1(2685,2301.32) ; v1(4206.98,3180) 4206.98,2904.44 ccw(c4306.98,2904.44) 4236.27,2833.73 Out2.6@4270,2800 ; v1(5587.74,2745) 5587.74,2327.74 ccw(c5661.32,2327.74) 5609.29,2275.71 5616.72,2268.28 cw(c5548.43,2200) 5645,2200 5645,1455.11 ccw(c5745,1455.11) 5674.29,1384.4 5834.4,1224.29 ccw(c5905.11,1295) 5905.11,1195 6138.58,1195 ccw(c6138.58,1295) 6209.29,1224.29 6315.71,1330.71 ccw(c6245,1401.42) 6345,1401.42 v1(6345,1743.19)
Shift1: R19.2 Shift1.2 | length 113.5
  Component Side w10: R19.2@3060.43,2640 3060.43,2751.88 cw(c3062.48,2751.88) Shift1.2@3061.03,2753.32
Shift2: R38.2 Shift2.2 | length 113.5
  Component Side w10: Shift2.2@6478.97,2753.32 cw(c6477.54,2751.89) 6479.57,2751.89 R38.2@6479.57,2640
Sw1: R39.1 SW1.3 SW1.4 | length 447.7
  Component Side w10: SW1.4@363.3,4647.07 425.37,4585 557.14,4585 SW1.3@619.21,4647.07 R39.1@759.57,4647.07
Sw2: R36.1 SW2.3 SW2.4 | length 430.6
  Component Side w10: SW2.4@1657.64,3620.95 1694.31,3584.29 ccw(c1765.02,3655) 1765.02,3555 1806.17,3555 ccw(c1806.17,3655) 1876.88,3584.29 SW2.3@1913.55,3620.95 1935.21,3599.29 ccw(c2005.92,3670) 2005.92,3570 R36.1@2025.45,3570
Sw3: R33.1 SW3.3 SW3.4 | length 432.4
  Component Side w10: SW3.4@1612.94,1761.17 1657.04,1717.07 ccw(c1710.32,1770.35) 1710.32,1695 1785.64,1695 ccw(c1785.64,1736.12) 1814.71,1707.04 SW3.3@1868.84,1761.17 1905.29,1724.72 ccw(c1950.07,1769.5) 1950.07,1706.17 R33.1@1975.45,1706.17
Sw4: R30.1 SW4.3 SW4.4 | length 417.4
  Component Side w10: SW4.4@2003.4,857.93 2054.16,807.17 ccw(c2119.77,872.8) 2119.77,780 2139.95,780 ccw(c2139.95,880) 2210.67,809.29 SW4.3@2259.31,857.93 R30.1@2364.57,857.93
Sw5: R27.1 SW5.3 SW5.4 | length 467.5
  Component Side w10: R27.1@8885.43,4607.07 8980.79,4607.07 SW5.4@9020.79,4647.07 9092.86,4575 9204.63,4575 SW5.3@9276.7,4647.07
Sw6: R24.1 SW6.3 SW6.4 | length 465.7
  Component Side w10: R24.1@7600.43,3580.95 7628.16,3580.95 ccw(c7628.16,3611.84) 7650,3590 7651.66,3591.66 cw(c7722.38,3520.95) 7722.38,3620.95 SW6.4@7726.46,3620.95 7799.78,3547.63 ccw(c7854.41,3602.25) 7854.41,3525 ccw(c7854.41,3602.25) 7909.04,3547.63 SW6.3@7982.36,3620.95
Sw7: R22.1 SW7.3 SW7.4 | length 444.1
  Component Side w10: R22.1@7660.43,1711.17 7679.74,1711.17 ccw(c7679.74,1811.17) 7750.45,1740.46 SW7.4@7771.16,1761.17 7825.99,1706.35 ccw(c7896.7,1777.06) 7896.7,1677.06 7901.53,1677.06 ccw(c7901.53,1777.06) 7972.24,1706.35 SW7.3@8027.07,1761.17
Sw8: R20.1 SW8.3 SW8.4 | length 443.3
  Component Side w10: R20.1@7270.43,812.93 7320,812.93 ccw(c7320,850.82) 7346.79,824.03 SW8.4@7380.69,857.93 7434.34,804.29 ccw(c7505.05,875) 7505.05,775 7512.25,775 ccw(c7512.25,875) 7582.96,804.29 SW8.3@7636.6,857.93
TXLED: optIn.5 optOut.5 | length 160
  Component Side w10: optOut.5@5370,2080 optIn.5@5530,2080
unused1: optIn.1 optOut.1 | length 160
  Component Side w10: optOut.1@5370,1680 optIn.1@5530,1680
pads on no net: IC1.11 IC1.14 IC1.18 IC1.19 IC1.20 IC2.11 IC2.14 IC2.18 IC2.19 IC2.20
copper on no net: | length 311.1
  Component Side w20: v1(6944.2,2176.22) ccw(c6942.28,2178.14) v1@6945,2178.14
  Bottom Layer w20: v1(6944.2,2176.22) 6942.99,2175 ccw(c6938.12,2179.86) 6945,2179.86 6945,2280.77 7024.94,2360.71 cw(c7095.65,2290) 7095.65,2390 v1(7105,2390)
  other v1: 6945,2277.2

## Polygon pours and split planes (outlines as drawn)
GND on Component Side "Component Side-No Net" (solid, pour order 0): 508 vertices, not listed, extent 21.58,508.43 9618.42,5135.22
5V on Bottom Layer "GND" (solid, pour order 1): 508 vertices, not listed, extent 21.58,508.43 9618.42,5135.22

## Silkscreen, mask and mechanical layers (free items; w line width, h text height)
Top Overlay:
  text "turnRacingGTMainPCB / by Eric Gorkow / ver 1.0" at 5745,3305 h60
Mechanical 1:
  drawing of 611 lines, arcs and shapes, not listed

## Text inside footprints (layer, text, board x,y; h text height)
BT1: Top Overlay "12" at 3590,715 h50; Top Overlay "11" at 3610.47,810 h50; Top Overlay "1" at 4330,810 h50; Top Overlay "2" at 4325,710 h50
BT2: Top Overlay "12" at 6151.52,710 h50; Top Overlay "11" at 6160,810 h50; Top Overlay "1" at 6871.12,810 h50; Top Overlay "2" at 6865,710 h50
extDisp: Top Overlay "2" at 5151.46,3528.62 h50; Top Overlay "1" at 5171.14,3430.2 h50; Top Overlay "8" at 5627.05,3528.62 h50; Top Overlay "7" at 5623.11,3430.2 h50
Hat1: Top Overlay "9" at 2100,2530 h50; Top Overlay "10" at 1975,2530 h50; Top Overlay "2" at 1990,3130 h50; Top Overlay "1" at 2105,3130 h50
Hat2: Top Overlay "9" at 7515,3070.91 h50; Top Overlay "10" at 7590,3070.91 h50; Top Overlay "2" at 7615,2474.1 h50; Top Overlay "1" at 7520,2474.1 h50
Power: Top Overlay "5" at 3438.11,710.2 h50; Top Overlay "6" at 3442.05,808.62 h50; Top Overlay "2" at 3066.46,808.62 h50; Top Overlay "1" at 3086.14,710.2 h50
USBin: Top Overlay "4" at 4823.55,1653.38 h50 r270; Top Overlay "3" at 4725.12,1657.32 h50 r270; Top Overlay "2" at 4823.55,1928.98 h50 r270; Top Overlay "1" at 4725.12,1909.29 h50 r270